# EAGLE board board (EAGLE 8.2.2)
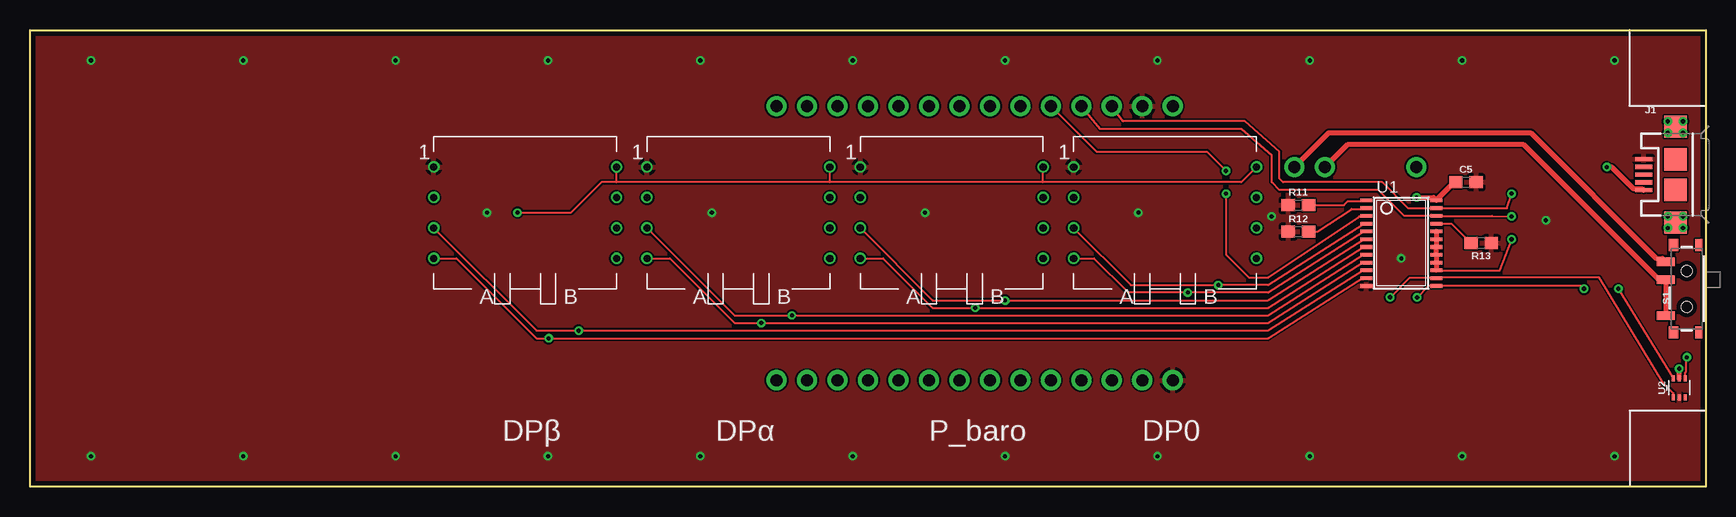
[diagram p0: board, top side]
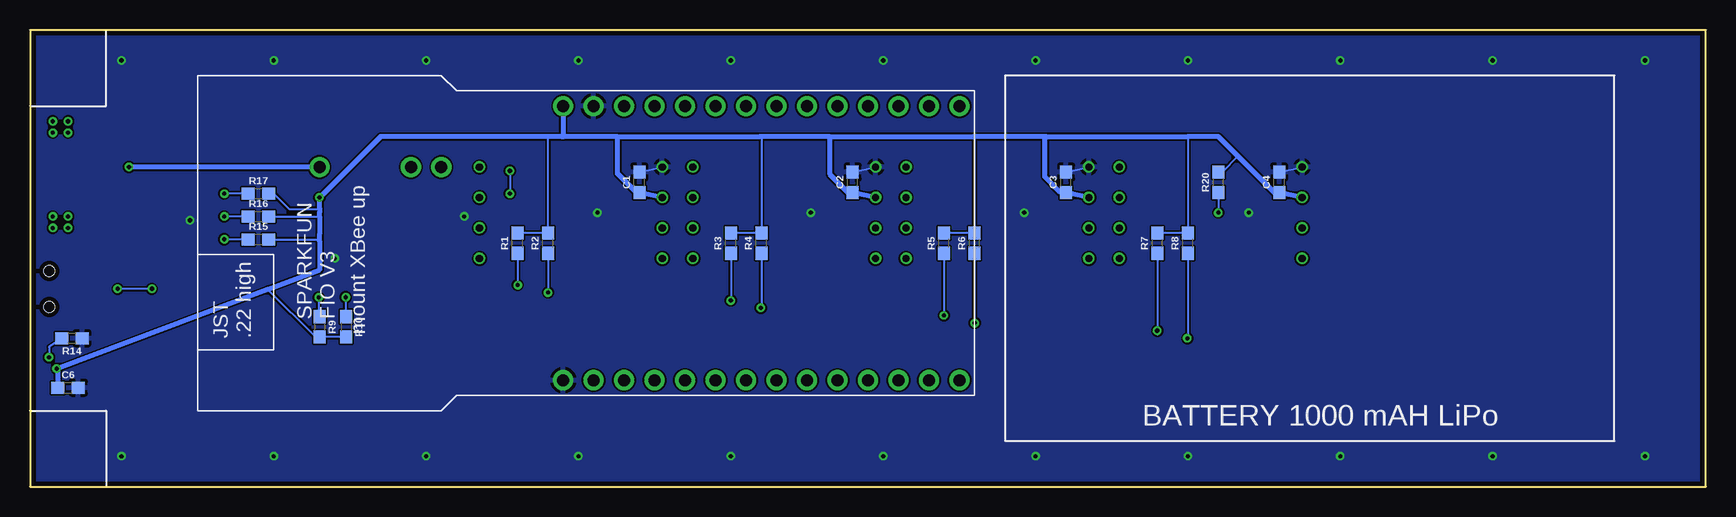
[diagram p1: board, bottom side, seen from below]

Size 139.7 x 38.1 mm. Coordinates in mm from the lower left corner, seen from the top.
Outline: 0,0 0,38.1 139.7,38.1 139.7,0 0,0
Copper layers (1*16): Top 0.0356mm / dielectric 1.5011mm / Bottom 0.0356mm
Design rules "oshpark-2layer": minimum track width 6mil, minimum drill 13mil, track to track 6mil, track to pad 6mil, pad to pad 6mil, via to via 6mil, smd to smd 6mil, copper to edge 15mil, drill to drill 6mil, minimum pad ring 7mil, minimum via ring 7mil, stop-mask expansion 2.5mil, vias tented up to drill 0mil, thermal gap 10mil

## Footprints (pad centres in the part's own frame; a part is rotated, then mirrored left to right if it is on the bottom)
0603 = smd 1.1 x 1: 1 -0.85,0; 2 0.85,0
USB-MICROB = smd 1.4 x 0.35: D+ -2.65,0; D- -2.65,-0.65; GND -2.65,1.3; ID -2.65,0.65; VBUS -2.65,-1.3 | smd 1.9 x 1.8: MT1 0,-4; MT2 0,4 | smd 1.9 x 1.9: P$1 0,-1.27; P$2 0,1.27
SWITCH_SPST_SMD_A = smd 0.7 x 1.5: 1 -2.25,-1.75; 2 -0.75,-1.75; 3 2.25,-1.75 | smd 1 x 0.6: GND1 -3.65,1; GND3 3.65,1 | smd 1 x 0.8: GND2 -3.65,-1.1; GND4 3.65,-1.1 | hole 0.9: -1.5,0; 1.5,0
TSSOP24 = smd 0.305 x 0.991: 1 -3.575,-2.918; 2 -2.925,-2.918; 3 -2.275,-2.918; 4 -1.625,-2.918; 5 -0.975,-2.918; 6 -0.325,-2.918; 7 0.325,-2.918; 8 0.975,-2.918; 9 1.625,-2.918; 10 2.275,-2.918; 11 2.925,-2.918; 12 3.575,-2.918; 13 3.575,2.918; 14 2.925,2.918; 15 2.275,2.918; 16 1.625,2.918; 17 0.975,2.918; 18 0.325,2.918; 19 -0.325,2.918; 20 -0.975,2.918; 21 -1.625,2.918; 22 -2.275,2.918; 23 -2.925,2.918; 24 -3.575,2.918
SOT563 = smd 0.508 x 0.249: 1 -0.8,0.498; 2 -0.8,0.003; 3 -0.8,-0.506; 4 0.776,-0.506; 5 0.776,0.003; 6 0.776,0.498
SPARKFUN_FIO_V3 = drill 1 pad 1.676: P$1 11.43,16.51; P$2 11.43,13.97; P$3 11.43,11.43; P$4 11.43,8.89; P$5 11.43,6.35; P$6 11.43,3.81; P$7 11.43,1.27; P$8 11.43,-1.27; P$9 11.43,-3.81; P$10 11.43,-6.35; P$11 11.43,-8.89; P$12 11.43,-11.43; P$13 11.43,-13.97; P$14 11.43,-16.51; P$15 -11.43,-16.51; P$16 -11.43,-13.97; P$17 -11.43,-11.43; P$18 -11.43,-8.89; P$19 -11.43,-6.35; P$20 -11.43,-3.81; P$21 -11.43,-1.27; P$22 -11.43,1.27; P$23 -11.43,3.81; P$24 -11.43,6.35; P$25 -11.43,8.89; P$26 -11.43,11.43; P$27 -11.43,13.97; P$28 -11.43,16.51; P$29 6.35,26.67; P$30 6.35,29.21; P$31 6.35,36.83
ALL_SENSORS_E1BD_8PIN_THRU = drill 0.6: P$1 -7.62,3.81; P$2 -7.62,1.27; P$3 -7.62,-1.27; P$4 -7.62,-3.81; P$5 7.62,-3.81; P$6 7.62,-1.27; P$7 7.62,1.27; P$8 7.62,3.81

## Placement (x,y rotation side)
C1  4.7uF  [0603]  88.9,25.4 90 bottom
C2  4.7uF  [0603]  71.12,25.4 90 bottom
C3  4.7uF  [0603]  53.34,25.4 90 bottom
C4  4.7uF  [0603]  35.56,25.4 90 bottom
C5  4.7uF  [0603]  119.7,25.4 0 top
C6  4.7uF  [0603]  136.53,8.26 0 bottom
J1  [USB-MICROB]  137.16,26.04 0 top
R1  4.7k  [0603]  99.06,20.32 90 bottom
R2  4.7k  [0603]  96.52,20.32 90 bottom
R3  4.7k  [0603]  81.28,20.32 90 bottom
R4  4.7k  [0603]  78.74,20.32 90 bottom
R5  4.7k  [0603]  63.5,20.32 90 bottom
R6  4.7k  [0603]  60.96,20.32 90 bottom
R7  4.7k  [0603]  45.72,20.32 90 bottom
R8  4.7k  [0603]  43.18,20.32 90 bottom
R9  4.7k  [0603]  115.57,13.34 270 bottom
R10  4.7k  [0603]  113.35,13.34 270 bottom
R11  4.7k  [0603]  105.73,23.5 0 top
R12  4.7k  [0603]  105.73,21.27 0 top
R13  4.7k  [0603]  120.97,20.32 180 top
R14  4.7k  [0603]  136.21,12.38 180 bottom
R15  4.7k  [0603]  120.65,20.64 0 bottom
R16  4.7k  [0603]  120.65,22.54 0 bottom
R17  4.7k  [0603]  120.65,24.45 0 bottom
R20  4.7k  [0603]  40.64,25.4 90 bottom
S1  [SWITCH_SPST_SMD_A]  138.11,16.51 270 top
U1  [TSSOP24]  114.3,20.32 270 top
U2  TMP102  [SOT563]  137.48,8.26 90 top
U$2  SPARKFUN_FIO_V3  [SPARKFUN_FIO_V3]  78.74,20.32 90 bottom
UP1  [ALL_SENSORS_E1BD_8PIN_THRU]  94.61,22.86 0 top
UP2  [ALL_SENSORS_E1BD_8PIN_THRU]  76.83,22.86 0 top
UP3  [ALL_SENSORS_E1BD_8PIN_THRU]  59.05,22.86 0 top
UP4  [ALL_SENSORS_E1BD_8PIN_THRU]  41.27,22.86 0 top

## Library data of the parts
C1-C6 = SparkFun-Capacitors; PROD_ID: CAP-08280
J1 = SparkFun-Connectors; PROD_ID: CONN-09505; SF_ID: PRT-08533
R1-R17 R20 = SparkFun-Resistors; PROD_ID: RES-07857
S1 = SparkFun-Switches; PROD_ID: SWCH-10651; SF_SKU: COM-10860
U1 U$2 UP1-UP4 = microbuilder
U2 = SparkFun-Sensors; PROD_ID: IC-09303

## Nets
#I2C_RST: U1.3 U$2.P$5
GND: C1.2 C2.2 C3.2 C4.2 C5.2 C6.2 J1.GND R11.1 R12.1 R13.1 R14.1 U1.12 U2.2 U$2.P$2 U$2.P$28 UP1.P$1 UP2.P$1 UP3.P$1 UP4.P$1
N$1: R1.1 U1.4 UP1.P$3
N$2: R2.1 U1.5 UP1.P$4
N$3: R3.1 U1.6 UP2.P$3
N$4: R4.1 U1.7 UP2.P$4
N$5: R5.1 U1.8 UP3.P$3
N$6: R6.1 U1.9 UP3.P$4
N$7: R7.1 U1.10 UP4.P$3
N$8: R8.1 U1.11 UP4.P$4
N$9: S1.1 U$2.P$29
N$10: J1.VBUS U$2.P$31
N$12: R13.2 U1.21
N$13: R12.2 U1.2
N$14: R11.2 U1.1
N$15: R20.1 UP1.P$8 UP2.P$8 UP3.P$8 UP4.P$8
N$16: R9.1 U1.13 U2.6
N$17: R10.1 U1.14 U2.1
N$18: S1.2 S1.3 U$2.P$30
N$19: R14.2 U2.4
N$28: R15.1 U1.15 U1.16 U1.17 U1.18 U1.19 U1.20
SCL_IN: R16.1 U1.22 U$2.P$4
SDA_IN: R17.1 U1.23 U$2.P$3
VCC: C1.1 C2.1 C3.1 C4.1 C5.1 C6.1 R1.2 R2.2 R3.2 R4.2 R5.2 R6.2 R7.2 R8.2 R9.2 R10.2 R15.2 R16.2 R17.2 R20.2 U1.24 U2.5 U$2.P$1 U$2.P$26 UP1.P$2 UP2.P$2 UP3.P$2 UP4.P$2

## Tracks (layer width: path | path; a pad name or v marks a point on that pad's centre or on a via)
#I2C_RST  (via drill 0.35)
  Top 0.152: U$2.P$5 88.9,27.94 98.11,27.94 v99.69,26.35 | v99.69,24.45 99.69,19.37 101.6,17.46 103.19,17.46 110.81,22.54 U1.3
  Bottom 0.152: v99.69,26.35 v99.69,24.45
GND  (via drill 0.35)
  Bottom 0.152: C1.2 UP1.P$1 | C2.2 UP2.P$1 | C3.2 UP3.P$1 | C4.2 UP4.P$1
  other vias: 103.5,22.54 126.36,22.23 38.1,22.86 56.83,22.86 74.61,22.86 92.39,22.86 114.3,19.05 5.08,35.56 17.78,35.56 30.48,35.56 30.48,2.54 17.78,2.54 5.08,2.54 119.38,35.56 132.08,35.56 132.08,2.54 119.38,2.54 43.18,35.56 55.88,35.56 55.88,2.54 43.18,2.54 68.58,35.56 81.28,35.56 93.98,35.56 106.68,35.56 106.68,2.54 93.98,2.54 81.28,2.54 68.58,2.54
  pour Top (isolate 0.152): 0,38.1 139.7,38.1 139.7,0 0,0
  pour Bottom: 0,38.1 139.7,38.1 139.7,0 0,0
N$1  (via drill 0.35)
  Top 0.152: U1.4 111.34,21.91 111.12,21.91 103.19,16.83 v99.05,16.83 91.76,16.83 UP1.P$3
  Bottom 0.152: R1.1 v99.06,16.84 v99.05,16.83
N$2  (via drill 0.35)
  Top 0.152: U1.5 111.36,21.27 111.12,21.27 103.19,16.19 v96.52,16.19 91.56,16.19 88.7,19.05 UP1.P$4
  Bottom 0.152: R2.1 v96.52,16.2 v96.52,16.19
N$3  (via drill 0.35)
  Top 0.152: 103.25,15.6 111.12,20.64 U1.6 | 103.25,15.6 103.19,15.56 | UP2.P$3 75.25,15.56 81.25,15.56 v81.28,15.53 103.18,15.53 103.25,15.6
  Bottom 0.152: R3.1 v81.28,15.53
N$4  (via drill 0.35)
  Top 0.152: UP2.P$4 71.12,19.05 75.25,14.92 v78.79,14.92 103.19,14.92 111.12,20 U1.7
  Bottom 0.152: R4.1 78.74,14.97 v78.79,14.92
N$5  (via drill 0.35)
  Top 0.152: UP3.P$3 58.74,14.29 v63.51,14.29 103.19,14.29 111.12,19.37 U1.8
  Bottom 0.152: R5.1 63.5,14.3 v63.51,14.29
N$6  (via drill 0.35)
  Top 0.152: UP3.P$4 53.34,19.05 58.74,13.65 v60.95,13.65 103.19,13.65 111.12,18.73 U1.9
  Bottom 0.152: v60.95,13.65 60.96,13.66 R6.1
N$7  (via drill 0.35)
  Top 0.152: UP4.P$3 42.23,13.02 v45.74,13.02 103.19,13.02 111.12,18.1 U1.10
  Bottom 0.152: R7.1 45.72,13 | 45.72,12.7 45.72,13 | 45.72,13 v45.74,13.02
N$8  (via drill 0.35)
  Top 0.152: UP4.P$4 35.56,19.05 42.23,12.38 v43.23,12.38 103.19,12.38 111.12,17.46 U1.11
  Bottom 0.152: v43.23,12.38 43.18,12.44 R8.1
N$9
  Top 0.406: U$2.P$29 108.27,29.53 125.09,29.53 135.57,19.05 136.07,19.05 S1.1
N$10  (via drill 0.35)
  Top 0.406: J1.VBUS 134.39,24.85 133.66,24.85 131.85,26.67 v131.44,26.67
  Bottom 0.406: U$2.P$31 v131.44,26.67
N$11  (via drill 0.35)
  other vias: 136.53,22.54
N$12
  Top 0.152: U1.21 118.49,21.95 R13.2
N$13
  Top 0.152: R12.2 107.31,21.27 110.17,23.18 111.31,23.18 U1.2
N$14
  Top 0.152: R11.2 109.54,23.5 109.86,23.81 111.3,23.81 U1.1
N$15  (via drill 0.35)
  Top 0.152: v40.64,22.86 45.09,22.86 47.62,25.4 48.9,25.4 | 84.42,25.4 100.97,25.4 UP1.P$8 | 84.42,25.4 84.42,26.63 UP2.P$8 | 84.42,25.4 66.67,25.4 | 66.67,25.4 UP3.P$8 | 66.67,25.4 48.9,25.4 | 48.9,25.4 UP4.P$8
  Bottom 0.152: R20.1 v40.64,22.86
N$16  (via drill 0.35)
  Top 0.152: v132.4,16.51 U2.6 | v129.54,16.51 129.31,16.75 U1.13 116.58,16.75 v115.63,15.79
  Bottom 0.152: v129.54,16.51 v132.4,16.51 | v115.63,15.79 115.63,14.24 R9.1
N$17  (via drill 0.35)
  Top 0.152: v113.38,15.81 114.97,17.39 U1.14 117.28,17.46 130.81,17.46 136.21,8.57 136.98,7.8 U2.1 136.98,7.48
  Bottom 0.152: v113.38,15.81 113.38,14.22 R10.1
N$18
  Top 0.406: U$2.P$30 109.86,28.57 124.46,28.57 135.89,17.14 136.27,17.14 136.36,17.23 | S1.3 136.34,15.55 136.36,15.57 136.36,17.23 | 136.36,17.23 S1.2
N$19  (via drill 0.35)
  Top 0.152: U2.4 137.98,9.53 138.06,9.6 138.06,10.74 v138.11,10.79
  Bottom 0.152: R14.2 138.11,11.64 v138.11,10.79
N$20  (via drill 0.35)
  other vias: 137.79,22.54
N$21  (via drill 0.35)
  other vias: 137.79,21.59
N$22  (via drill 0.35)
  other vias: 136.53,21.59
N$23  (via drill 0.35)
  other vias: 136.53,30.48
N$24  (via drill 0.35)
  other vias: 136.53,29.53
N$25  (via drill 0.35)
  other vias: 137.79,29.53
N$26  (via drill 0.35)
  other vias: 137.79,30.48
N$28  (via drill 0.35)
  Top 0.152: 117.24,21.27 U1.20 | 117.24,19.37 U1.17 | U1.15 122.5,18.05 v123.51,20.64
  Top 0.406: U1.20 U1.19 U1.18 U1.17 U1.16 U1.15
  Bottom 0.152: R15.1 v123.51,20.64
SCL_IN  (via drill 0.35)
  Top 0.152: 117.18,22.59 U1.22 121.87,22.59 v123.51,22.54 | 117.18,22.59 114.56,22.59 112.39,24.77 104.14,24.77 103.5,25.4 103.5,27.62 100.97,29.84 89.22,29.84 U$2.P$4 | 117.23,22.54 117.18,22.59
  Bottom 0.152: R16.1 v123.51,22.54
SDA_IN  (via drill 0.35)
  Top 0.152: U1.23 114.87,23.25 112.71,25.4 104.46,25.4 104.14,25.72 104.14,27.94 101.28,30.48 91.12,30.48 U$2.P$3 | 117.28,23.18 U1.23 | U1.23 123.12,23.25 v123.51,24.45
  Bottom 0.152: R17.1 v123.51,24.45
VCC  (via drill 0.35)
  Top 0.406: v115.57,24.13 116.98,24.13 U1.24 117.24,23.89 118.75,25.4 C5.1 | U2.5 v137.47,9.84 v137.48,9.84
  Bottom 0.152: 43.14,29.21 43.18,29.17 R8.2 R7.2 | 61.04,29.21 60.96,29.13 R6.2 R5.2 | 78.87,29.21 78.74,29.08 R4.2 R3.2 | 95.25,29.14 95.18,29.21 | R1.2 R2.2 96.52,29.05 96.36,29.21 | R20.2 40.31,26.25 39,27.57 | 115.6,22.86 115.57,22.89 | 115.69,20.95 115.57,21.07 | R17.2 119.38,24.45 118.11,23.18 115.63,23.18 115.57,23.24 | R16.2 115.58,22.54 115.57,22.53 | R15.2 115.73,20.64 115.57,20.48 | R10.2 R9.2 115.9,12.48 119.88,16.47
  Bottom 0.406: UP1.P$2 C1.1 89.15,24.55 90.72,26.12 90.72,29.16 90.77,29.21 | UP2.P$2 C2.1 71.49,24.55 73,26.06 73,29.15 73.06,29.21 | UP3.P$2 C3.1 53.79,24.55 55.1,25.86 55.1,29.09 54.98,29.21 | UP4.P$2 C4.1 35.98,24.55 39,27.57 40.64,29.21 43.14,29.21 54.98,29.21 | 54.98,29.21 61.04,29.21 73.06,29.21 | 73.06,29.21 78.87,29.21 90.77,29.21 | 90.77,29.21 95.18,29.21 95.39,29.21 | 95.39,29.21 96.36,29.21 110.49,29.21 v115.57,24.13 115.57,23.24 115.57,22.89 115.57,22.53 115.57,21.07 115.57,20.48 115.57,18.1 119.88,16.47 v137.48,9.84 137.38,9.74 C6.1 | U$2.P$1 95.25,29.35 95.39,29.21

## Text on the board
tPlace: DPβ | DPα | P_baro | DP0
bPlace: BATTERY 1000 mAH LiPo